# Altium PCB 175-00023, rev3, PCB, Sinistro Pwr Supply.PcbDoc (part 1 of 2)
Units mil, origin at the board's own origin, x right, y up, seen from the top; angles counter-clockwise.
Board outline 8267.72 x 3937.01 mil, 5 copper layers (TopLayer (*.GTL), MidLayer1 (*.G1), AGND (*.GP1), GND (*.GP2), BottomLayer (*GBL)); 101 components, 68 nets, 420 pads, 79 vias.
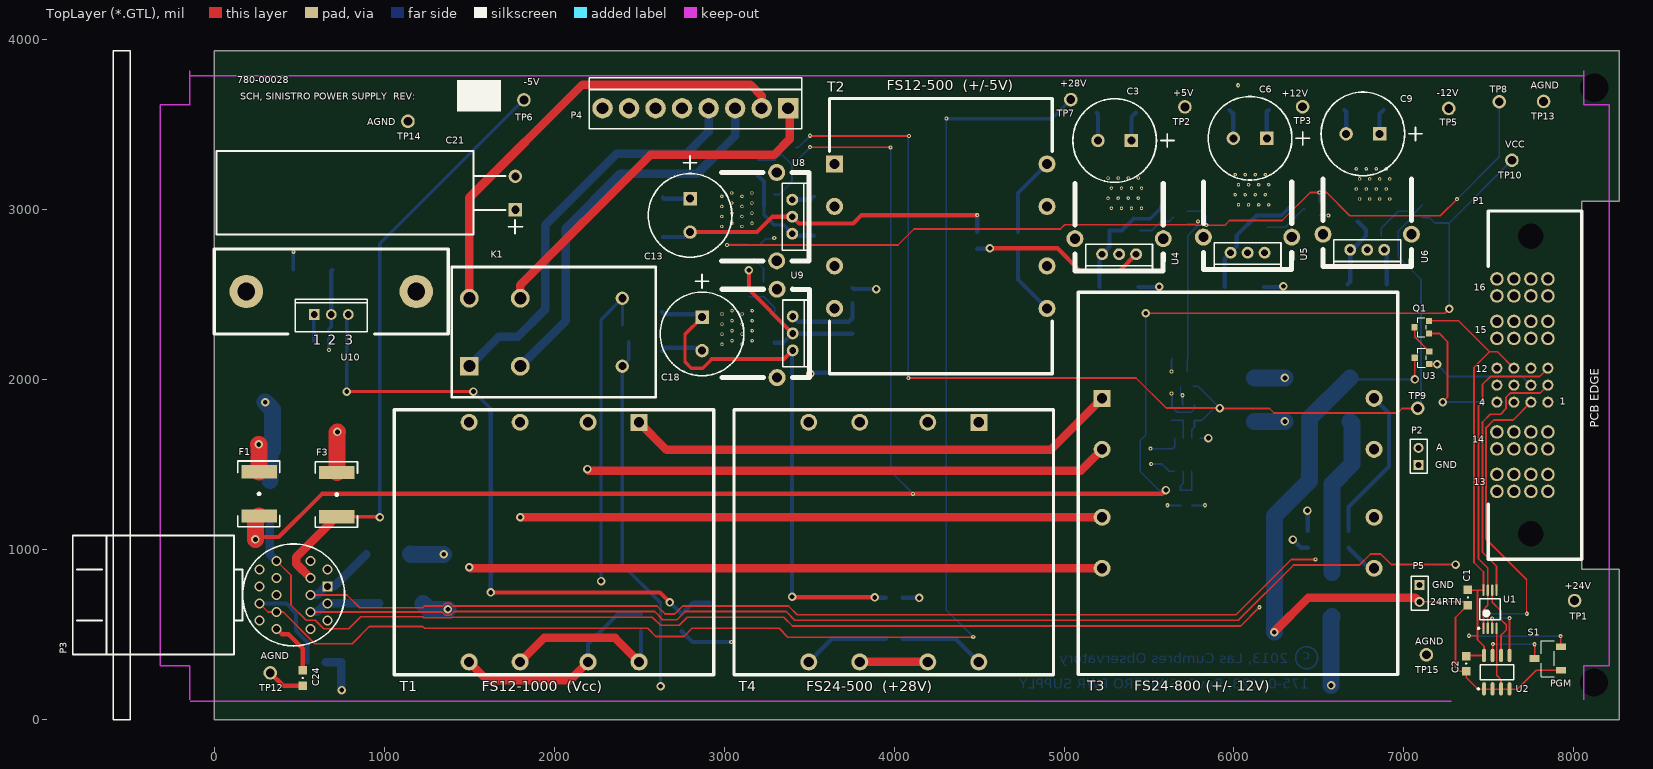
[diagram p0: TopLayer (*.GTL) view]
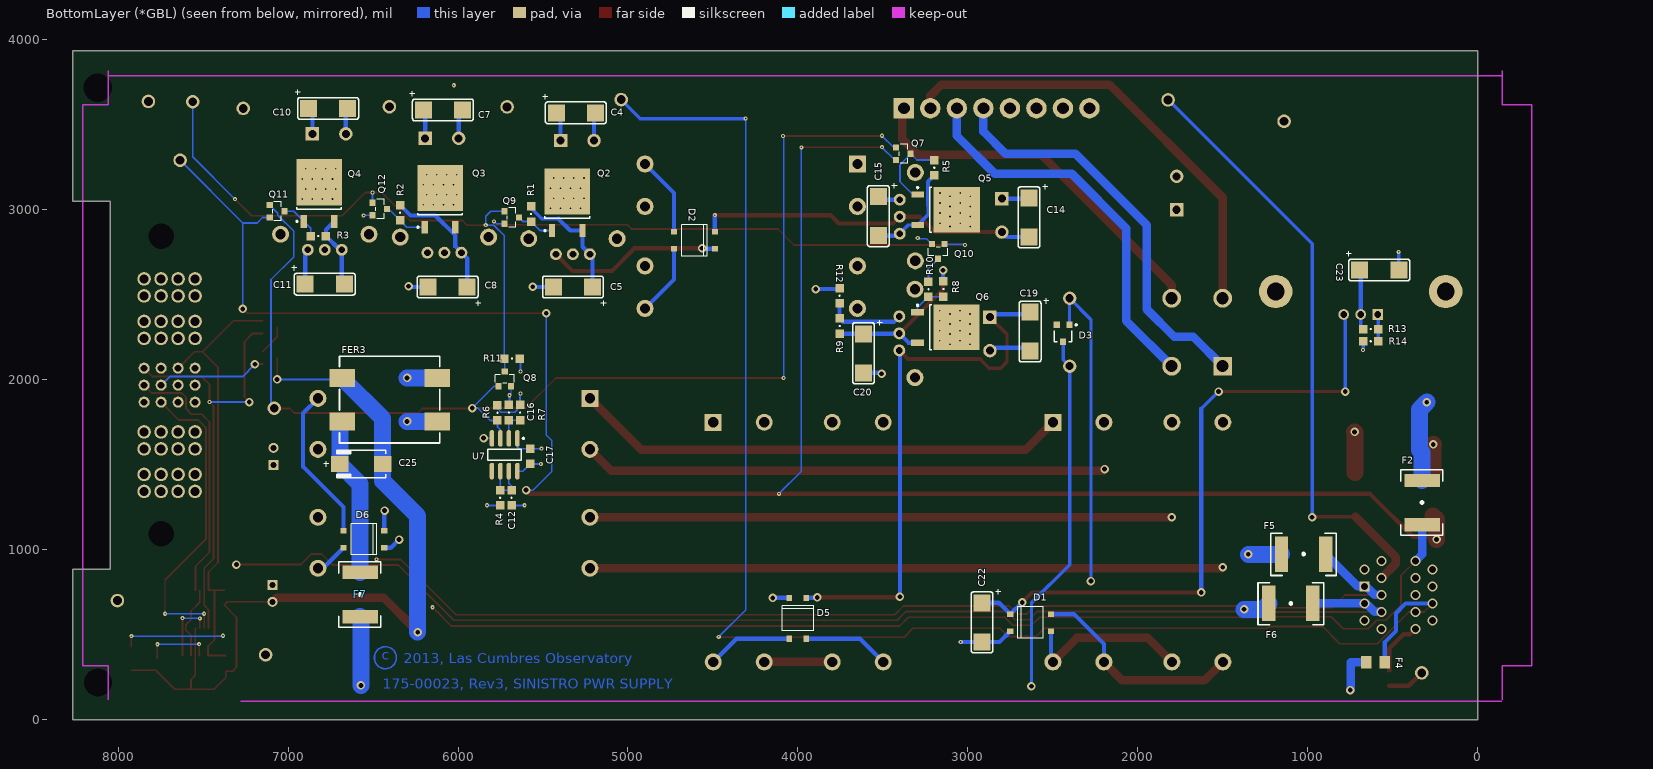
[diagram p1: BottomLayer (*GBL) view, seen from below]
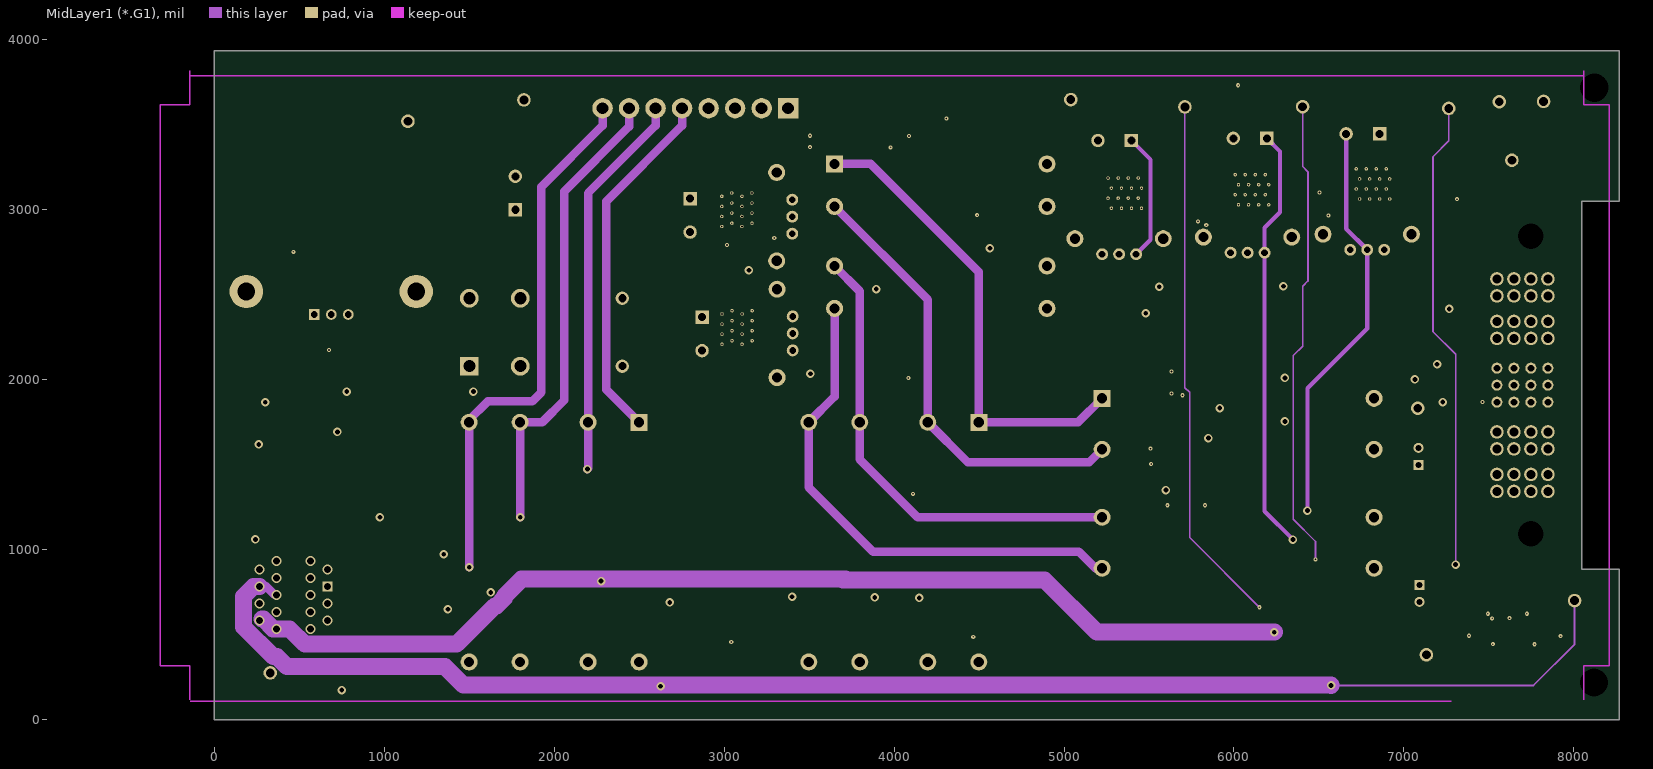
[diagram p2: MidLayer1 (*.G1)]
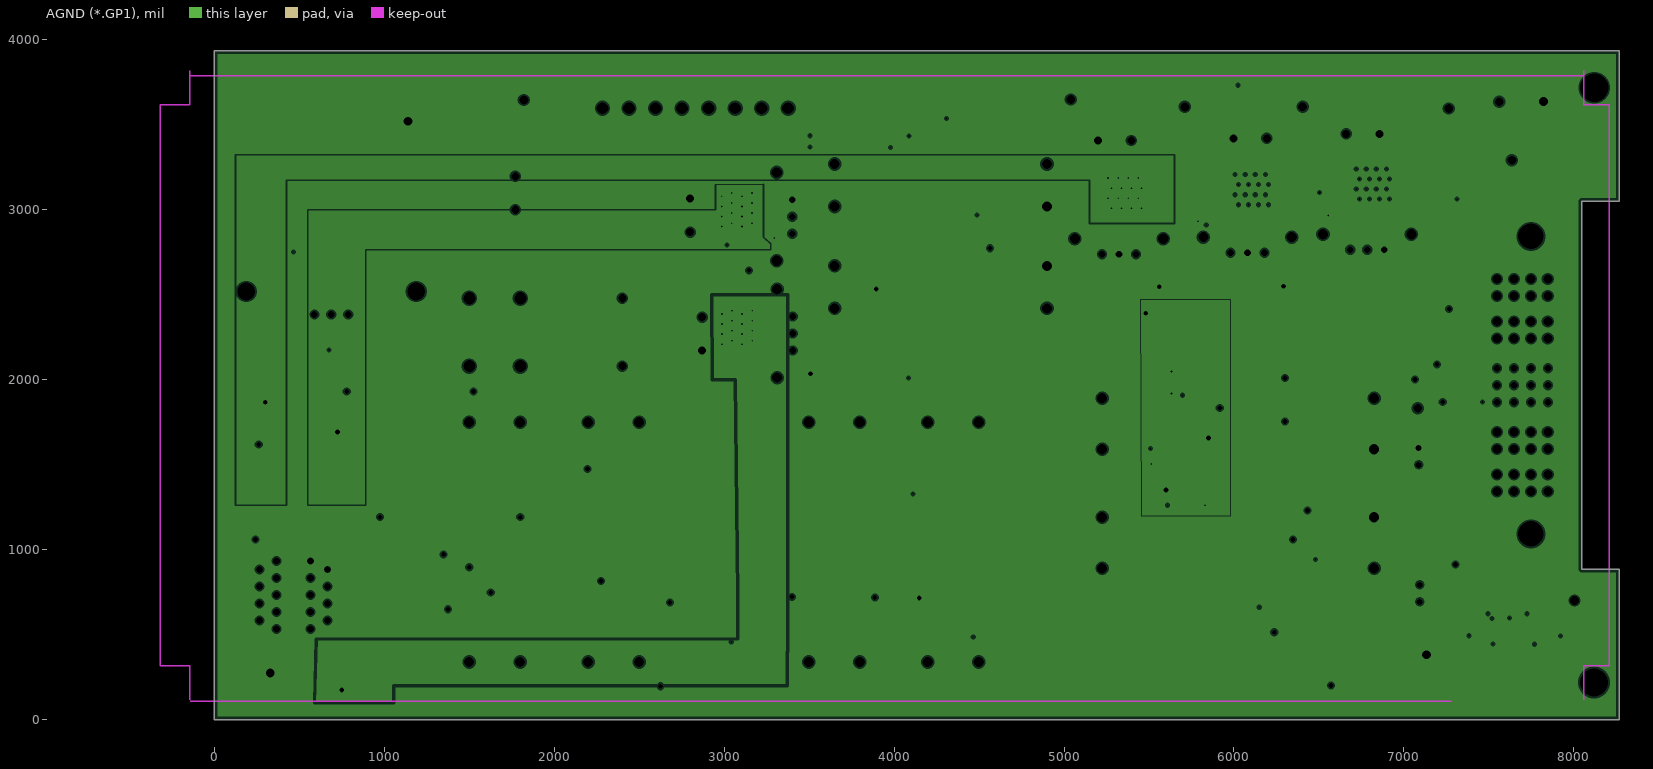
[diagram p3: AGND (*.GP1), clearances drawn from the general rule]
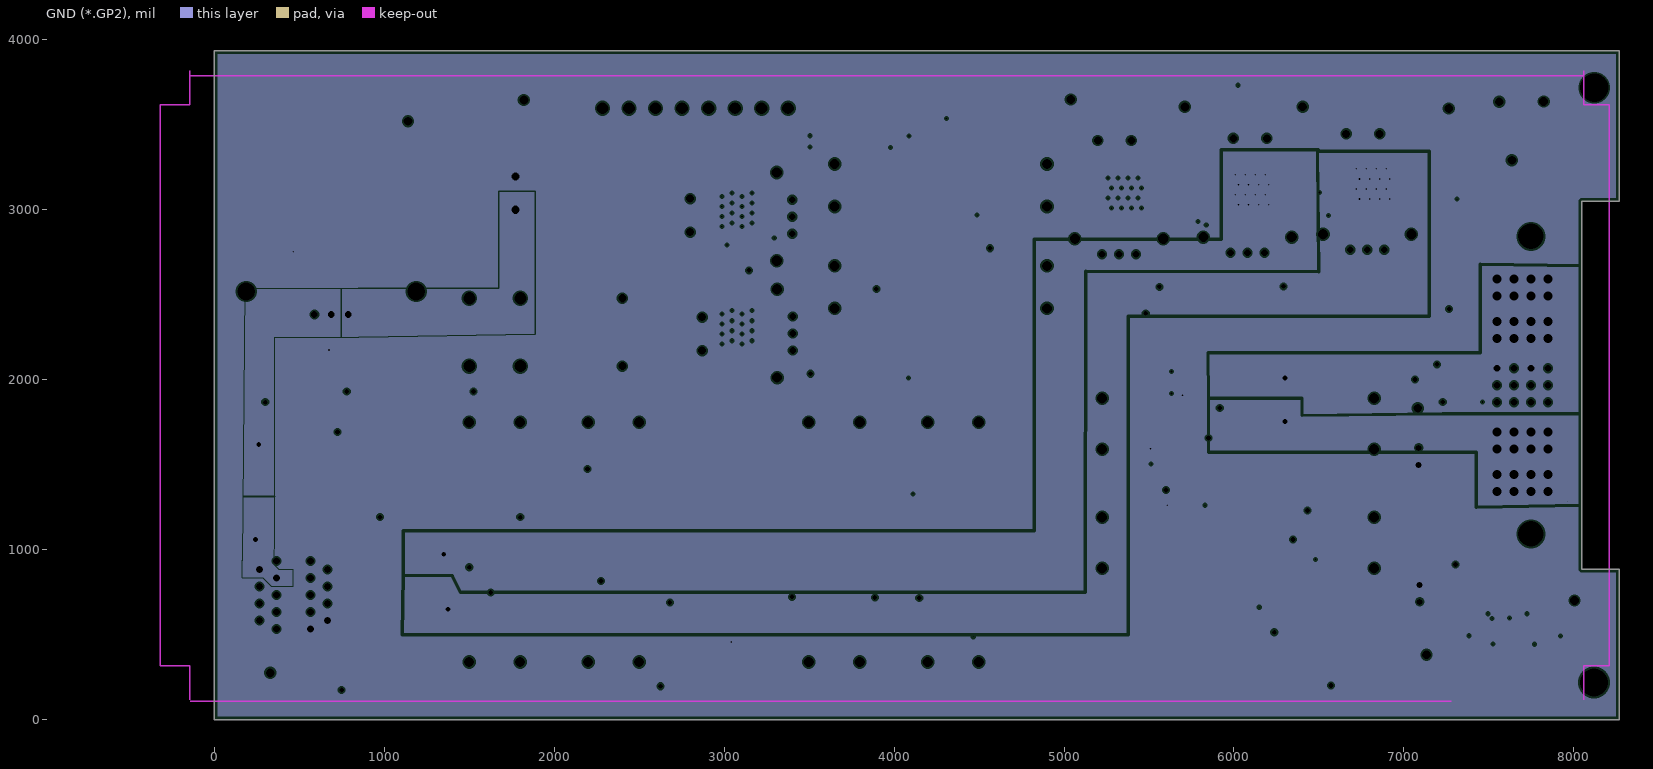
[diagram p4: GND (*.GP2), clearances drawn from the general rule]

## Layer stack, top to bottom
TopLayer (*.GTL): signal copper 1.4
Dielectric: core 12.6, FR-4, Dk 4.8
MidLayer1 (*.G1): signal copper 1.4
Dielectric: prepreg 12.6, FR-4, Dk 4.8
AGND (*.GP1): plane copper 1.4, net (Multiple Nets)
Dielectric: core 12.6, FR-4, Dk 4.8
GND (*.GP2): plane copper 1.4, net (Multiple Nets)
Dielectric: prepreg 12.6, FR-4, Dk 4.8
BottomLayer (*GBL): signal copper 1.4

## Board outline
0,0 0,3937.01 8267.72,3937.01 8267.72,3051.18 8047.24,3051.18 8047.24,885.83 8267.72,885.83 8267.72,0

## Design rules (kind name [scope] priority, off if disabled: settings)
Clearance [All] p1: gap=5
ComponentClearance "Big Bypass Caps" [(HasFootprint('CAP, Thru Hole 12.5 mm dia'))] p1: gap=-100 collisioncheckmode=3 verticalgap=-100 showdistances=FALSE
ComponentClearance [All] p2: gap=10 collisioncheckmode=3 verticalgap=10 showdistances=FALSE
FabricationTestPointUsage TestPointUsage [All] p1: valid=0 allowmultiple=FALSE
FabricationTestpoint Testpoint [All] p1: side=3 testpointundercomponent=TRUE minsize=40 maxsize=100 preferedsize=60 minholesize=20 maxholesize=40 preferedholesize=32 testpointgrid=1 allowsidetop=TRUE allowsidebottom=TRUE usegrid=TRUE gridtolerance=0.01
PlaneClearance [All] p1: clearance=10
PlaneConnect "Dpak plane" [(HasFootprint('LEMO SIZE 3 18-PIN PCB') OR HasFootprint('TO-252(D-PAK)  PowerPAD'))] p1: planeconnectstyle=Direct reliefexpansion=20 reliefentries=4 reliefconductorwidth=10 reliefairgap=10
PlaneConnect [All] p2: planeconnectstyle=Relief reliefexpansion=20 reliefentries=4 reliefconductorwidth=10 reliefairgap=10
PolygonConnect [All] p1: connectstyle=Relief reliefconductorwidth=10 reliefentries=4 polygonreliefangle="90 Angle"
RoomDefinition "780-00028_rev3_Pg1, Sinistro Power Supply" [InComponentClass('780-00028_rev3_Pg1, Sinistro Power Supply')] p1: confinementstyle=ConfineIn formatcopy=TRUE lockcomponents=FALSE outline -1336,-116 8165.84,-116 8165.84,3704.08 -1336,3704.08
RoomDefinition "780-00028_rev3_Pg2, Sinistro Power Supply" [InComponentClass('780-00028_rev3_Pg2, Sinistro Power Supply')] p2: confinementstyle=ConfineIn formatcopy=TRUE lockcomponents=FALSE outline -1900,-1600 8850,-1600 8850,6050 -1900,6050
RoutingVias [All] p1: holewidth=28 width=50 viastyle="Through Hole" minholewidth=10 minwidth=24 maxholewidth=28 maxwidth=50
SilkscreenOverComponentPads [All] p1: minsilkscreentomaskgap=10
SolderMaskExpansion [All] p1: expansion=2
Width [All] p1: maxlimit=120 minlimit=7 preferedwidth=20
22 further rules are at their usual default settings.

## Classes and differential pairs
component class "780-00028_rev3_Pg2, Sinistro Power Supply": C3 C4 C5 C6 C7 C8 C9 C10 C11 C12 C13 C14 C15 C16 C17 C18 C19 C20 D2 D3 D5 D6 F2 F3 F4 F5 F6 HS1 HS2 HS3 HS4 HS5 HS6 K1 P4 Q2 Q3 Q4 Q5 Q6 Q7 Q8 Q9 Q10 Q11 Q12 R1 R2 R3 R4 R5 R6 R7 R8 R9 R10 R11 R12 T2 T3 T4 TP2 TP3 TP5 TP6 TP7 TP8 TP9 U4 U5 U6 U7 U8 U9
component class "780-00028_rev3_Pg1, Sinistro Power Supply": C1 C2 C21 C22 C23 C24 C25 D1 F1 F7 FER3 P1 P2 P3 P5 Q1 R13 R14 S1 T1 TP1 TP10 TP12 TP13 TP14 TP15 U1 U2 U3 U10

## Components (designator, comment, footprint, x,y, rotation, side; value= is the part's Value field where it differs from the comment)
C1 "Cap SMD" SMD_0805 7376.3,720 r270 top
C2 "Cap SMD" SMD_0805 7366.3,330 r270 top
C3 "10V" "CAP, Thru Hole 12.5 mm dia" 5298,3408 r0 top
C4 "35V" SMD_CAP_6032 5307,3571 r0 bottom
C5 "35V" SMD_CAP_6032 5324,2546 r180 bottom
C6 "25V" "CAP, Thru Hole 12.5 mm dia" 6094.57,3421 r0 top
C7 "35V" SMD_CAP_6032 6089,3588 r0 bottom
C8 "35V" SMD_CAP_6032 6061,2546 r180 bottom
C9 "25V" "CAP, Thru Hole 12.5 mm dia" 6758.43,3447 r0 top
C10 "35V" SMD_CAP_6032 6764,3597 r0 bottom
C11 "35V" SMD_CAP_6032 6783.99,2563 r0 bottom
C12 "1u" SMD_0805 5685,1306 r270 bottom
C13 "10V" "CAP, Thru Hole 12.5 mm dia" 2800,2967.57 r90 top
C14 "35V" SMD_CAP_6032 2641,2956 r90 bottom
C15 "35V" SMD_CAP_6032 3527,2963 r90 bottom
C16 "1u" smd_0805 5701,1807 r270 bottom
C17 "Cap SMD" SMD_0805 5576,1550 r270 bottom
C18 "50V" "CAP, Thru Hole 12.5 mm dia" 2870.44,2270 r90 top
C19 "35V" SMD_CAP_6032 2634,2284 r90 bottom
C20 "35V" SMD_CAP_6032 3614,2156 r90 bottom
C21 "10V" "CAP, Thru Hole 12.5 mm dia" 1771.65,3099.06 r270 top
C22 "35V" SMD_CAP_6032 2917,573 r90 bottom
C23 "35V" SMD_CAP_6032 580,2646 r0 bottom
C24 "1u" SMD_0805 521,245 r90 top
C25 "35V" SMD_CAP_7343 6569.28,1505 r0 bottom
D1 "Diode Bridge" "DIODE BRIDGE, MBS-2" 2631,571 r270 bottom
D2 "Diode Bridge" "DIODE BRIDGE, MBS-2" 4609,2821 r90 bottom
D3 "Diode BAS16" SOT-23 2440,2274 r0 bottom
D5 "Diode Bridge" "DIODE BRIDGE, MBS-2" 4001,597 r0 bottom
D6 "Diode Bridge" "DIODE BRIDGE, MBS-2" 6554,1062 r90 bottom
Designator92 "Comment" "TARGET MECHANICAL 5" -725,-1553 r0 top
Designator93 "Comment" "TARGET MECHANICAL 5" -1038,4238 r0 top
Designator94 "Comment" "TARGET MECHANICAL 5" 8481,4222 r0 top
F1 "Res 0805" "SMD 2920  PolySwitch" 264,1329 r90 top
F2 "Res 0805" "SMD 2920  PolySwitch" 328,1278 r90 bottom
F3 "Res 0805" "SMD 2920  PolySwitch" 721.3,1325 r90 top
F4 "Res 0805" SMD_1206 602,338 r180 bottom
F5 "Res 0805" "SMD 2920  PolySwitch" 1025,975 r0 bottom
F6 "Res 0805" "SMD 2920  PolySwitch" 1100,684.33 r0 bottom
F7 "Res 0805" "SMD 2920  PolySwitch" 6576,737 r90 bottom
FER3 "ACM1513-551-2PL-TL" ACM1513-551-2PL 6402,1883 r0 bottom
K1 "G4W-2212P" "RELAY OMRON G4W-2212P" 1501,2080 r180 top
P1 "PETC-02-12-02--01-S-RA-SD" PETC-02-12-02-01-RA 7696.85,1968.5 r0 top locked
P2 "Header 2" HDR1X2 7086,1500 r90 top
P3 "LEMO 3S 18p RT PCB" "LEMO SIZE 3 18-PIN PCB" 466.93,734.33 r180 top
P4 "Header 8 0.156\"" "HDR 1X8 0.156\"" 3377,3598.06 r180 top
P5 "Header 2" HDR1X2 7092,794 r270 top
Q1 "FDV304P" SMD_SOT23_3 7105,2309 r90 top
Q2 "I" "TO-252(D-PAK)  PowerPAD" 5357.76,3049.26 r90 bottom
Q3 "I" "TO-252(D-PAK)  PowerPAD" 6105.63,3069.37 r90 bottom
Q4 "STD30NF03L" "TO-252(D-PAK)  PowerPAD" 6817.68,3103.37 r90 bottom
Q5 "STD30NF03L" "TO-252(D-PAK)  PowerPAD" 3124.74,3000.63 r180 bottom
Q6 "I" "TO-252(D-PAK)  PowerPAD" 3125.68,2308.43 r180 bottom
Q7 "FDV304P" SMD_SOT23_3 3380,3330 r270 bottom
Q8 "MOSFET-N SOT23" SMD_SOT23_3 5725,2005 r180 bottom
Q9 "MOSFET-N SOT23" SMD_SOT23_3 5684.11,2955 r270 bottom
Q10 "MOSFET-N SOT23" SMD_SOT23_3 3175,2755 r0 bottom
Q11 "FDV304P" SMD_SOT23_3 7065,2992 r270 bottom
Q12 "MOSFET-N SOT23" SMD_SOT23_3 6460,3005 r270 bottom
R1 "Res 0805" SMD_0805 5570,2976 r90 bottom
R2 "Res 0805" SMD_0805 6341,2983 r90 bottom
R3 "Res 0805" SMD_0805 6822,2846 r0 bottom
R4 "Res 0805" SMD_0805 5752,1306 r90 bottom
R5 "Res 0805" SMD_0805 3198,3248 r90 bottom
R6 "Res 0805" SMD_0805 5768,1806 r270 bottom
R7 "Res 0805" SMD_0805 5635,1807 r90 bottom
R8 "Res 0805" SMD_0805 3144,2534 r90 bottom
R9 "Res 0805" SMD_0805 3754,2317 r270 bottom
R10 "Res 0805" SMD_0805 3231.97,2533 r270 bottom
R11 "Res 0805" SMD_0805 5682.69,2125 r180 bottom
R12 "Res 0805" SMD_0805 3755,2495 r270 bottom
R13 "Res 0805" SMD_0805 629.98,2298.68 r0 bottom
R14 "Res 0805" SMD_0805 629.98,2226.68 r180 bottom
S1 "CJS-1200TB" CAS-120B 7846.3,360 r90 top
T1 "12 VA" "XFRMR TRIAD FS10-1200 (12VA)" 2000,1045 r270 top locked
T2 "6VA" "XFRMR TRIAD FS10-600 (6 VA)" 4275,2845 r0 top locked
T3 "20VA" "XFRMR TRIAD FS28-700 (20VA)" 6024.3,1391 r0 top locked
T4 "12 VA" "XFRMR TRIAD FS10-1200 (12VA)" 3998.43,1045 r270 top locked
TP1 "Test point" PAD_80D_052H 8004,701 r90 top
TP2 "Test point" PAD_80D_052H 5711,3606 r90 top
TP3 "Test point" PAD_80D_052H 6404,3607 r90 top
TP5 "Test point" PAD_80D_052H 7264,3597 r90 top
TP6 "Test point" PAD_80D_052H 1822,3647 r90 top
TP7 "Test point" PAD_80D_052H 5040,3649 r90 top
TP8 "Test point" PAD_80D_052H 7561,3636 r90 top
TP9 "Test point" PAD_80D_052H 7081.3,1833 r90 top
TP10 "Test point" PAD_80D_052H 7635,3292 r90 top
TP12 "Test point" PAD_80D_052H 330,276 r90 top
TP13 "Test point" PAD_80D_052H 7822,3638 r90 top
TP14 "Test point" PAD_80D_052H 1140,3521 r90 top
TP15 "Test point" PAD_80D_052H 7132,382 r90 top
U1 "SN74CBT3306PWLE" PW008_N 7506.3,650 r90 top
U2 "M24C32RMN1" SOP8_N 7546.3,280 r90 top
U3 "DS2411" SMD_SOT23_3 7106.3,2130 r90 top
U4 "Voltage Reg, Pos Fixed" "TO-220 w/Heatsink 7136DG" 5324,2640.57 r0 top
U5 "Voltage Reg, Pos Fixed" "TO-220 w/Heatsink 7136DG" 6080,2649.57 r0 top
U6 "Voltage Reg, Neg Fixed" "TO-220 w/Heatsink 7136DG" 6784,2666.57 r0 top
U7 "LM555CMX" M08A_M 5726,1559 r270 bottom
U8 "Voltage Reg, Neg Fixed" "TO-220 w/Heatsink 7136DG" 3499.43,2960 r90 top
U9 "LM350T" "TO-220 w/Heatsink 7136DG" 3501.97,2273 r90 top
U10 "LM350T" TO-220-AB 688.98,2384.25 r0 top

## Footprints (in the part's own frame and the unit in brackets; to place one, negate y for a bottom-side part, rotate by r counter-clockwise, add the part's x,y. Pads: shape width x height; smd on the part's side, far side on the other; paste and mask are expansions set on the pad)
ACM1513-551-2PL [mil] "TDK Power Line Common Mode Filter, 10A"
  rect 150x106 smd: 1(-280,128) 2(-280,-128) 3(280,-128) 4(280,128)
  silkscreen extent -295,-255 295,255
"CAP, Thru Hole 12.5 mm dia" [mm]
  rect 2x2 hole 1.2: 1(2.5,0)
  round 2 hole 1.2: 2(-2.5,0)
  silkscreen extent -6.25,-6.25 8.87,6.25
CAS-120B [mm] "Copal Electronics CAS SMD Slide Switch"
  rect 1x1.5 smd: 1(-1.75,-1.95) 2(0,1.95) 3(1.75,-1.95)
  silkscreen extent -2.69,-1 2.69,1
"DIODE BRIDGE, MBS-2" [mm] "SMD DIODE BRIDGE"
  rect 0.82x0.92 smd: 1(-1.275,-3.05) 2(1.275,-3.05) 3(1.275,3.05) 4(-1.275,3.05)
  silkscreen extent -2.35,-1.9 2.35,1.9
HDR1X2 [mm] "Connector; Header; 2 Position"
  rect 1.5x1.5 hole 0.9: 1(0,0)
  round 1.5 hole 0.9: 2(2.54,0)
  silkscreen extent -1.27,-1.27 3.81,1.27
"HDR 1X8 0.156\"" [mil] "Connector; Header; 8 Position"
  rect 120x120 hole 70: 1(0,0)
  round 120 hole 70: 2(156,0) 3(312,0) 4(468,0) 5(624,0) 6(780,0) 7(936,0) 8(1092,0)
  silkscreen extent -80,-180 1170,120
"LEMO SIZE 3 18-PIN PCB" [mm]
  rect 1.5x1.5 hole 1: 1(-5.08,-1.27)
  round 1.5 hole 1: 2(-5.08,-3.81) 3(-2.54,-5.08) 4(2.54,-5.08) 5(5.08,-3.81) 6(5.08,-1.27) 7(5.08,1.27) 8(5.08,3.81) 9(2.54,5.08) 10(-2.54,5.08) 11(-5.08,3.81) 12(-5.08,1.27) 13(-2.54,0) 14(-2.54,-2.54) 15(2.54,-2.54) 16(2.54,0) 17(2.54,2.54) 18(-2.54,2.54)
  silkscreen extent -7.62,-8.89 33.02,8.89
M08A_M [mm] "SOIC, 8-Leads, Body 4.9x3.9mm, Pitch 1.27mm, IPC Low Density"
  oval 2.5x0.7 smd: 1(-2.45,1.905) 2(-2.45,0.635) 3(-2.45,-0.635) 4(-2.45,-1.905) 5(2.45,-1.905) 6(2.45,-0.635) 7(2.45,0.635) 8(2.45,1.905)
  silkscreen extent -2.57,-2.5 0.8,2.93, body extent -2,-2.5 2,2.5, height 1.75
PAD_80D_052H [mil]
  round 80 hole 52: 1(0,0)
PETC-02-12-02-01-RA [mil] "Samtec Male Pins, PWR(4), Signal(12), Right Angle"
  round 59.06 hole 150 unplated: 0(50,-875) 0(50,875)
  round 65 hole 40: 1(150,-100) 2(50,-100) 3(-50,-100) 4(-150,-100) 5(150,0) 6(50,0) 7(-50,0) 8(-150,0) 9(150,100) 10(50,100) 11(-50,100) 12(-150,100)
  round 80 hole 52: 13(-150,-625) 13(-150,-525) 13(-50,-625) 13(-50,-525) 13(50,-625) 13(50,-525) 13(150,-625) 13(150,-525) 14(-150,-375) 14(-150,-275) 14(-50,-375) 14(-50,-275) 14(50,-375) 14(50,-275) 14(150,-375) 14(150,-275) 15(-150,275) 15(-150,375) 15(-50,275) 15(-50,375) 15(50,275) 15(50,375) 15(150,275) 15(150,375) 16(-150,525) 16(-150,625) 16(-50,525) 16(-50,625) 16(50,525) 16(50,625) 16(150,525) 16(150,625)
  silkscreen extent -200,-1025 350,1025
PW008_N [mm] "SOP, 8-Leads, Body 3x4.4mm, Pitch 0.65mm, IPC Medium Density"
  oval 1.7x0.35 smd: 1(-2.85,0.975) 2(-2.85,0.325) 3(-2.85,-0.325) 4(-2.85,-0.975) 5(2.85,-0.975) 6(2.85,-0.325) 7(2.85,0.325) 8(2.85,0.975)
  silkscreen extent -2.97,-1.55 1.6,1.82, body extent -2.25,-1.55 2.25,1.55, height 3.1
"RELAY OMRON G4W-2212P" [mm] "OMRON AC SWITCHING RELAY"
  rect 2.8x2.8 hole 1.8: 1(0,0)
  round 2.8 hole 1.8: 2(0,-10.16) 3(-7.62,0) 4(-7.62,-10.16)
  round 2 hole 1.2: 5(-22.86,0) 6(-22.86,-10.16)
  silkscreen extent -27.86,-14.83 2.64,4.67
"SMD 2920  PolySwitch" [mm] "Use with SMD polyswitch fuse"
  rect 2x5.3 smd: 1(3.3,0) 2(-3.3,0)
  silkscreen extent -4.9,-3.1 4.9,3.2
SMD_0805 [mil]
  rect 50x50 smd: 1(-45,0) 2(45,0)
  silkscreen extent -1,-1 1,1
smd_0805 [mil] "Chip Resistor; Body 2.0 x 1.3 mm (LxW typ)"
  rect 50x50 smd: 1(-45,0) 2(45,0)
  silkscreen extent -1,-1 1,1
SMD_1206 [mil]
  rect 63x75 smd: 1(-55,0) 2(55,0)
SMD_CAP_6032 [mil]
  rect 100x100 smd: NEG(-115,0) POS(115,0)
  silkscreen extent -179,-110 195,64
SMD_CAP_7343 [mil]
  rect 102x94 smd: NEG(-126,0) POS(126,0)
  silkscreen extent -145,-80 220,80
SMD_SOT23_3 [mil]
  rect 36x36 smd: 1(-37,-43) 2(37,-43) 3(0,43)
  silkscreen extent -57,-25 57,25
SOP8_N [mm] "SOIC, 8-Leads, Body 4.9x3.9mm, Pitch 1.27mm, IPC Medium Density"
  oval 2x0.6 smd: 1(-2.5,1.905) 2(-2.5,0.635) 3(-2.5,-0.635) 4(-2.5,-1.905) 5(2.5,-1.905) 6(2.5,-0.635) 7(2.5,0.635) 8(2.5,1.905)
  silkscreen extent -2.62,-2.5 1.1,2.88, body extent -2,-2.5 2,2.5, height 1.75
SOT-23 [mm] "SOT-23; 3 Leads; Body 3.0 x 2.6 mm, inc. leads (LxW max)"
  rect 0.9x0.95 smd: 1(-0.95,-1.25) 2(0.95,-1.25) 3(0,1.25)
  silkscreen extent -2.07,-1.37 1.3,1.25
"TARGET MECHANICAL 5" [mil]
"TO-220 w/Heatsink 7136DG" [mil]
  round 100 hole 60: 0(-260,190) 0(260,190)
  round 70 hole 40: 1(100,98.43) 2(0,98.43) 3(-100,98.43)
  silkscreen extent -260,0 260,515
TO-220-AB [mm] "TO, Thru-Hole, Vertical, Heatsink Mounted; 3 In-Line Leads; Pitch 2.54 mm"
  rect 1.6x1.6 hole 1: 1(-2.54,0)
  round 1.6 hole 1: 2(0,0) 3(2.54,0)
  silkscreen extent -5.35,-2.55 5.35,2.25
"TO-252(D-PAK)  PowerPAD" [mil] "D-PAK, 3-Pads, Body 6.2x6.7mm (max), IPC Medium Density"
  rect 74.8x37.4 smd: 1(-171.26,89.76) 3(-171.26,-89.76)
  round 20 hole 10: 2(-39.37,-19.69) 2(-39.37,98.43) 2(-39.37,-78.74) 2(-39.37,39.37) 2(19.68,-98.43) 2(19.68,-39.37) 2(19.68,19.68) 2(19.68,78.74) 2(78.74,-19.69) 2(78.74,98.43) 2(78.74,-78.74) 2(78.74,39.37) 2(137.8,78.74) 2(137.8,-98.43) 2(137.8,-39.37) 2(137.8,19.68)
  rect 271.65x267.72 smd: 2(59.06,0)
  silkscreen extent -176,-132 -88,135, body extent -98,-132 146,132, height 94
"XFRMR TRIAD FS10-600 (6 VA)" [mil] "TRANSFORMER, 6VA, 5V @ 1.2 A"
  rect 100x100 hole 60: 1(-625,425)
  round 100 hole 60: 2(-625,175) 3(-625,-175) 4(-625,-425) 5(625,425) 6(625,175) 7(625,-175) 8(625,-425)
  silkscreen extent -655,-810 655,810
"XFRMR TRIAD FS10-1200 (12VA)" [mil] "TRANSFORMER, 12 VA, 5V @ 2.4A"
  rect 100x100 hole 60: 1(-705,500)
  round 100 hole 60: 2(-705,200) 3(-705,-200) 4(-705,-500) 5(705,500) 6(705,200) 7(705,-200) 8(705,-500)
  silkscreen extent -780,-940 780,940
"XFRMR TRIAD FS28-700 (20VA)" [mil] "TRANSFORMER, 20VA 28VCT @ 0.7A"
  rect 100x100 hole 60: 1(-800,500)
  round 100 hole 60: 2(-800,200) 3(-800,-200) 4(-800,-500) 5(800,500) 6(800,200) 7(800,-200) 8(800,-500)
  silkscreen extent -940,-1125 940,1125

## Part data
C1 C2 C17: "Capacitor"
C3 C6 C9 C13 C18 C21: library part "Cap Elec, 330 uF, 35V", "Radial Thru hole"
C4 C5 C7 C8 C10 C11 C14 C15 C19 C20 C22 C23 C25: library part "Cap Tant 35V", "outline 6.0mm x 3.2mm"
C12 C16 C24: library part Cap, "Capacitor"
D1 D2 D5 D6: "Full Wave Diode Bridge"
D3: "Silicon Switching Diode for High-Speed Switching"
F1 F2 F3 F4 F5 F6 F7: library part "Fuse Resettable", "Polyswitch"
FER3: library part "Trans Ideal", "Transformer (Ideal)"
K1: library part "Relay 240V, 2 FORM A, DPST", "Omron G4W DPST Non-Latching"
P1: "SAMTEC, SIGNAL(12)+PWR(4)"
P2 P5: "Header, 2-Pin"
P3: library part "LEMO 18 pin PCB RT", "LEMO S3 18p RT"
P4: "Header, 6-Pin"
Q1 Q7 Q11: "P-MOSFET LOGIC LEVEL"
Q2 Q3 Q6: library part IRF5303P, "P-Chan MOSFET"
Q4 Q5: "N-Chan MOSFET"
Q8 Q9 Q10 Q12: "N Chan MOSFET LOGIC LEVEL"
R1 R2 R3 R4 R5 R6 R7 R8 R9 R10 R11 R12 R13 R14: library part "Res SMD", "Resistor 0805"
S1: library part SW_SPDT_DOUG
T1: library part "XFRMR, 120/240, 12 VA", "TRIAD FS12-1000"
T2: library part "XFRMR, 120/240, 12 VA", "TRIAD FS12-500"
T3: library part "XFRMR, 120/240, 12 VA", "TRIAD FS28-700"
T4: library part "XFRMR, 120/240, 12 VA", "TRIAD FS10-1200"
TP1 TP2 TP3 TP5 TP6 TP7 TP8 TP9 TP10 TP12 TP13 TP14 TP15: "Test Point"
U1: "Dual FET Bus Switch"
U2: "32 Kbit Serial I²C Bus EEPROM"
U3: "Silicon Serial Number"
U4 U5: "7805A"
U6 U8: "79xx"
U7: "Timer"
U9 U10: "3-Amp Adjustable Regulator"

## Free pads (board coordinates)
  round 196.85 hole 105.12 paste-6 mask-3.5: 0(188.98,2519.68) 0(1188.98,2519.68)
  round 157.48 hole 166.14 unplated: 2(8117.93,219) 2(8120.08,3719)

## Via types
v1: diameter 50, hole 28, TopLayer (*.GTL) to BottomLayer (*GBL), 41 vias
v2: diameter 24, hole 10, TopLayer (*.GTL) to BottomLayer (*GBL), 38 vias

## Nets (pads, with @x,y where several pads share a name; then routed paths per layer and width w, separated by ;. In a path a pad name is that pad's centre, name@x,y a point inside that pad or via, vN(x,y) a via of type N, cw(c..) or ccw(c..) an arc to the next point about the centre after c; other vN are vias at no path point)
24RTN: C1.2 C2.2 C24.2 C25.NEG D3.1 FER3.3 K1.6 P3.8 P3.9 P5.2 S1.1 U1.4 U2.1 U2.2 U2.3 U2.4 U3.3 | length 13472.7
  TopLayer (*.GTL) w10: v1(6237,515) v1@6237,518 ; U3.3@7063.3,2130 7063.3,2003.7 v1(7065,2002) ; P5.2@7092,694 7357.3,694 C1.2@7376.3,675 7303,601.7 7303,308 7326,285 C2.2@7366.3,285 7366.3,248.7 7436,179 U2.3@7571.3,179 ; U1.4@7544.68,537.8 7545.3,537.18 7545.3,261.7 7571.3,235.7 U2.3@7571.3,181.57 U2.3@7571.3,179 ; S1.1@7923.07,291.1 7779.1,291.1 7667,179 U2.3@7571.3,179
  TopLayer (*.GTL) w25: P3.9@366.93,534.33 398.44,502.81 437.81,502.81 521,419.63 C24.2@521,290
  TopLayer (*.GTL) w50: v1@6237,518 6438,719 7067,719 P5.2@7092,694
  MidLayer1 (*.G1) w100: P3.8@280.95,592.45 289.27,592.45 347.39,534.33 P3.9@366.93,534.33 443.67,534.33 533,445 1427,445 1651,669 1660.14,669 1707,715.86 1707,725 1809,827 3713.06,827 ; 3701,823 4886,823 5194,515 v1(6237,515)
  BottomLayer (*GBL) w10: FER3.3@6682,2011 6691,2002 v1(7065,2002)
  BottomLayer (*GBL) w20: v1(2276,816) 2276,2355 K1.6@2401,2480 2402.6,2478.4 D3.1@2402.6,2323.21
  BottomLayer (*GBL) w100: v1(6237,515) 6237,1199 6443.28,1405.28 C25.NEG@6443.28,1505 6443.28,1772.28 FER3.3@6682,2011
+3.3V_BKPL: C1.1 C2.1 P1.11 Q1.2 S1.3 U1.8 U2.8 | length 3327.5
  TopLayer (*.GTL) w10: Q1.2@7149.3,2347 7321.3,2347 7503.8,2164.5 ; C2.1@7366.3,375 7369.72,378.43 U2.8@7471.3,378.43 7471.3,433 7432.3,472 7432.3,494 ; C1.1@7376.3,765 7379.09,762.2 7432.3,762.2 ; v2(7383.3,494) 7432.3,494 ; P1.11@7646.85,2068.5 7550.85,2164.5 7503.8,2164.5 ; v2(7922.3,492) 7923.07,491.23 S1.3@7923.07,428.9 ; 7432.3,494 7432.3,762.2 ; 7432.3,762.2 U1.8@7467.91,762.2 7467.91,869.39 7412.3,925 7412.3,2073 7503.8,2164.5
  BottomLayer (*GBL) w10: v2(7383.3,494) 7385.3,492 v2(7922.3,492)
+5V: F2.2 P3.4 TP2.1 | length 9543.6
  TopLayer (*.GTL) w10: P3.4@366.93,934.33 452,849.26 452,675 541,586 594,586 644,536 791.35,536 861.35,606 1227,606 1233,600 1395.71,600 1399.21,603.5 2578,603.5 2625.5,556 2736.5,556 2784,603.5 3351.34,603.5 3402.84,552 6039.01,552 v2(6149,662)
  MidLayer1 (*.G1) w10: TP2.1@5711,3606 5711,1954 5739,1926 5739,1072 v2(6149,662)
  BottomLayer (*GBL) w50: F2.2@328,1148.08 328,973.26 P3.4@366.93,934.33
+5V_ON: Q2.1 Q9.3 R1.1 | length 225.5
  BottomLayer (*GBL) w10: Q2.1@5447.53,2878 5517,2878 R1.1@5570,2931 5617.11,2931 Q9.3@5641.11,2955
+12V: F5.2 P3.1 P3.13 TP3.1 | length 9351.4
  TopLayer (*.GTL) w10: P3.13@566.93,734.33 781.67,734.33 857,659 1227,659 1237.5,669.5 1345,669.5 1360.5,685 1389.5,685 1405,669.5 2605.33,669.5 2652.83,622 2709.17,622 2756.67,669.5 3378.68,669.5 3430.18,618 6011.67,618 6336.67,943 v2@6480,943
  MidLayer1 (*.G1) w10: TP3.1@6404,3607 6404,3254.75 6435,3223.75 6435,2581.25 6404,2550.25 6404,2198 6349,2143 6349,1180 6480,1049 v2(6480,944)
  BottomLayer (*GBL) w50: P3.13@566.93,734.33 606.3,734.33 656.3,784.33 P3.1@666.93,784.33 706.3,784.33 895.08,973.11 F5.2@895.08,975
+12V_ON: Q3.1 Q12.3 R2.1 | length 265.9
  BottomLayer (*GBL) w10: Q3.1@6195.39,2898.11 6301.11,2898.11 R2.1@6341,2938 6408,3005 Q12.3@6417,3005
+24V: D3.3 F7.2 K1.5 P3.6 P3.16 TP1.1 | length 11243.8
  MidLayer1 (*.G1) w10: v1(6571,202) 7762,202 8004,444 TP1.1@8004,701
  MidLayer1 (*.G1) w50: 306.3,784.33 P3.16@356.3,734.33
  MidLayer1 (*.G1) w100: P3.6@266.93,784.33 231.33,784.33 173,726 173,546 348,371 369.35,371 428.35,312 1358,312 1467,203 6570,203 v1(6571,202)
  BottomLayer (*GBL) w20: D3.3@2440,2224.79 2440,2119 K1.5@2401,2080 2401,913 2626,688 v1(2626,197)
  BottomLayer (*GBL) w100: v1(6571,202) 6571,602.08 F7.2@6576,607.08
+28V: F4.2 P3.7 P3.17 TP7.1 | length 8854.8
  TopLayer (*.GTL) w10: P3.7@266.93,684.33 316.93,634.33 P3.17@366.93,634.33 406.3,634.33 592.63,448 812,448 913,549 1227,549 1238.5,537.5 2550.66,537.5 2598.16,490 2763.84,490 2811.34,537.5 3324,537.5 3375.5,486 v2@4466,486
  BottomLayer (*GBL) w10: v2(4308,3537) 4308,646 v2(4466,488) v2@4466,485
  BottomLayer (*GBL) w20: v2(4308,3537) 4928,3537 TP7.1@5040,3649
  BottomLayer (*GBL) w25: P3.7@266.93,684.33 424.67,684.33 482,627 482,523 547,458 F4.2@547,338
+28V_ON: Q10.3 R10.1 | length 157.6
  BottomLayer (*GBL) w10: Q10.3@3175,2712 3231.97,2655.03 R10.1@3231.97,2578
-5V: F3.2 P3.14 TP6.1 | length 3555
  TopLayer (*.GTL) w20: F3.2@721.3,1195.08 971.92,1195.08 v1(975,1192)
  TopLayer (*.GTL) w50: P3.14@566.93,834.33 483,918.26 483,956.78 F3.2@721.3,1195.08
  BottomLayer (*GBL) w20: v1(975,1192) 975,2800 TP6.1@1822,3647
-5V_ON: Q5.1 Q7.3 R5.2 | length 479.7
  BottomLayer (*GBL) w10: R5.2@3198,3293 3300,3293 Q7.3@3337,3330 3337,3328.86 3400,3265.86 3400,3166 3324.39,3090.39 Q5.1@3296,3090.39
-12V: F6.2 P3.12 P3.18 TP5.1 | length 10203.4
  TopLayer (*.GTL) w10: P3.18@566.93,634.33 1341.17,634.33 1360.5,615 1389.5,615 1411,636.5 2591.66,636.5 2639.16,589 2722.84,589 2770.34,636.5 3365.01,636.5 3416.51,585 6025.34,585 6350.34,910 6738,910 6803,975 6863,975 6925,913 v1(7304,913)
  MidLayer1 (*.G1) w10: TP5.1@7264,3597 7264,3406 7171,3313 7171,2283 7304,2150 v1(7304,913)
  BottomLayer (*GBL) w50: P3.18@566.93,634.33 606.3,634.33 656.3,684.33 P3.12@666.93,684.33 F6.2@970.08,684.33
-12V_ON: Q4.1 Q11.3 R3.2 | length 242.2
  BottomLayer (*GBL) w10: R3.2@6867,2846 6867,2891.66 Q4.1@6907.45,2932.11 6967.34,2992 Q11.3@7022,2992
A: C3.2 C4.NEG C5.NEG C6.2 C7.NEG C8.NEG C9.1 C10.POS C11.POS C13.1 C14.POS C15.POS C18.2 C19.NEG C20.NEG C24.1 D5.2 P2.2 P3.2 P3.3 Q9.2 Q10.2 Q12.2 R12.1 T2.6 T2.7 T3.6 T3.7 TP12.1 TP13.1 TP14.1 TP15.1 U4.2 U5.2 U6.1 U8.1 | length 2275
  TopLayer (*.GTL) w25: TP12.1@330,276 406,200 C24.1@521,200
  BottomLayer (*GBL) w10: Q10.2@3212,2798 3244,2830 3290,2830 v2(3295,2835) ; Q9.2@5727.11,2918 5773.89,2918 v2(5788,2932.11) ; Q12.2@6503,2968 6554,2968 v2(6555,2967)
  BottomLayer (*GBL) w25: C19.NEG@2634,2169 2654,2189 2853.01,2189 C18.2@2870.44,2171.57 ; C14.POS@2641,3071 2646,3066 C13.1@2800,3066 ; U8.1@3401,3060 3509,3060 C15.POS@3527,3078 ; v1(3508,2036) 3513,2041 C20.NEG@3614,2041 ; R12.1@3755,2540 3761,2534 v1(3896,2534) ; D5.2@4051.2,717.08 4147.92,717.08 v1(4148,717) ; C4.NEG@5192,3571 5199.57,3563.43 C3.2@5199.57,3408 ; C5.NEG@5439,2546 5560,2546 v1(5561,2547) ; C7.NEG@5974,3588 5996.15,3565.85 C6.2@5996.15,3421 ; C8.NEG@6176,2546 6287,2546 v1(6291,2550) ; C9.1@6856.85,3447 6856.85,3564.85 C10.POS@6880,3588 ; U6.1@6884,2765 6898.99,2750.01 C11.POS@6898.99,2563
AA: P4.5 T1.1 T2.1 T3.1 T4.1 | length 7810.1
  TopLayer (*.GTL) w50: T1.1@2500,1750 2662,1588 4921.3,1588 T3.1@5224.3,1891
  MidLayer1 (*.G1) w50: T1.1@2500,1750 2307,1943 2307,3049.94 2753,3495.94 P4.5@2753,3598.06 ; T2.1@3650,3270 3863,3270 4498.43,2634.57 T4.1@4498.43,1750 5083.3,1750 T3.1@5224.3,1891
BB: P4.7 T1.3 T2.3 T3.3 T4.3 | length 8938.7
  TopLayer (*.GTL) w50: v1(1801,1192) 2358,1192 2359,1191 T3.3@5224.3,1191
  MidLayer1 (*.G1) w50: v1(1801,1192) 1800,1193 T1.3@1800,1750 1930,1750 2061,1881 2061,3109.51 2441,3489.51 P4.7@2441,3598.06 ; T2.3@3650,2670 3798.43,2521.57 T4.3@3798.43,1750 3798.43,1531.57 4139,1191 T3.3@5224.3,1191
CC: P4.6 T1.2 T2.2 T3.2 T4.2 | length 8025.7
  TopLayer (*.GTL) w50: v1(2196,1475) 2205,1466 5099.3,1466 T3.2@5224.3,1591
  MidLayer1 (*.G1) w50: v1(2196,1475) 2200,1479 T1.2@2200,1750 2200,3098.94 2597,3495.94 P4.6@2597,3598.06 ; T2.2@3650,3020 4198.43,2471.57 T4.2@4198.43,1750 4434.43,1514 5147.3,1514 T3.2@5224.3,1591
DD: P4.8 T1.4 T2.4 T3.4 T4.4 | length 9978
  TopLayer (*.GTL) w50: v1(1501,897) 1507,891 2392,891 ; 2359,891 2392,891 ; T3.4@5224.3,891 2392,891
  MidLayer1 (*.G1) w50: v1(1501,897) 1500,898 T1.4@1500,1750 1500,1764 1610,1874 1872,1874 1925,1927 1925,3135.94 2285,3495.94 P4.8@2285,3598.06 ; T2.4@3650,2420 3650,1901.57 T4.4@3498.43,1750 3498.43,1366.57 3877,988 5087.83,988 5184.83,891 T3.4@5224.3,891
GND: C12.2 C16.1 C17.1 C21.2 C22.NEG C23.NEG D1.2 P2.1 P3.10 P3.11 P5.1 Q8.2 R14.1 U7.1 | length 879.9
  BottomLayer (*GBL) w7: 5687.6,1918.4 5688,1918.8 Q8.2@5688,1962
  BottomLayer (*GBL) w10: v2(5509,1595) C17.1@5576,1595 5639,1595 5651,1607 U7.1@5651,1655.46 ; v2(5608,1262) 5609,1261 C12.2@5685,1261 ; 5687.6,1918.4 v2(5697,1909) 5697,1856 C16.1@5701,1852
  BottomLayer (*GBL) w20: C23.NEG@465,2646 465,2752 v2(466,2753) ; v2(675,2176) R14.1@675,2243
  BottomLayer (*GBL) w25: D1.2@2751.08,520.8 2813.88,458 C22.NEG@2917,458 v2(3042,458)
I2C_SCL: U1.6 U2.6 | length 430.3
  TopLayer (*.GTL) w10: U1.6@7519.09,762.2 7519.09,692.2 7571.3,640 7571.3,589 7601.3,559 7601.3,527.89 7571.3,497.89 U2.6@7571.3,378.43
I2C_SDA: U1.3 U2.5 | length 381.3
  TopLayer (*.GTL) w10: U1.3@7519.09,537.8 v2(7519.09,596.8) ; U2.5@7621.3,378.43 v2(7621.3,598)
  BottomLayer (*GBL) w10: v2(7519.09,596.8) 7520.3,598 v2(7621.3,598)
LINE: K1.2 P4.2 | length 2692.8
  TopLayer (*.GTL) w50: K1.2@1501,2480 1501,3071 2167,3737 3155,3737 3221,3671 P4.2@3221,3598.06
  BottomLayer (*GBL) w50: K1.2@1501,2480 K1.2@1505,2484
NetC3_1: C3.1 C4.POS D2.1 U4.1 | length 1956.9
  TopLayer (*.GTL) w25: v1(4564,2774) 4961,2774 5094.43,2640.57 5325.57,2640.57 U4.1@5424,2739
  MidLayer1 (*.G1) w25: C3.1@5396.43,3408 5509,3295.43 5509,2824 U4.1@5424,2739
  BottomLayer (*GBL) w25: D2.1@4488.92,2770.8 4560.8,2770.8 v1(4564,2774) ; C3.1@5396.43,3408 5396.43,3545.43 C4.POS@5422,3571
NetC5_pos: C5.POS Q2.3 R1.2 U4.3 | length 724.1
  BottomLayer (*GBL) w20: 5409,2947 5507,2947 R1.2@5570,3010
  BottomLayer (*GBL) w25: C5.POS@5209,2546 5209,2724 U4.3@5224,2739 5268,2783 Q2.3@5268,2878 5340,2878 5409,2947 ; R1.2@5570,3010 R1.2@5570,3021
NetC6_1: C6.1 C7.POS D6.1 U5.1 | length 2778.6
  MidLayer1 (*.G1) w25: C6.1@6193,3421 6271,3343 6271,2986 6180,2895 U5.1@6180,2748 6180,1227 v1(6347,1060)
  BottomLayer (*GBL) w25: C6.1@6193,3421 6193,3577 C7.POS@6204,3588 ; v1(6347,1060) 6395.2,1011.8 D6.1@6433.92,1011.8
NetC8_pos: C8.POS Q3.3 R2.2 U5.3 | length 731.1
  BottomLayer (*GBL) w25: C8.POS@5946,2546 5946,2714 U5.3@5980,2748 6015.87,2783.87 6015.87,2848.87 6134,2967 6280,2967 R2.2@6341,3028
NetC9_2: C9.2 C10.NEG D6.2 U6.2 | length 2677.9
  MidLayer1 (*.G1) w25: v1(6432,1231) 6432,1950 6784,2302 U6.2@6784,2765 6660,2889 C9.2@6660,3447
  BottomLayer (*GBL) w25: v1(6432,1231) 6433.92,1229.08 D6.2@6433.92,1112.2 ; C10.NEG@6650,3588 6660,3578 C9.2@6660,3447
NetC11_neg: C11.NEG Q4.3 R3.1 U6.3 | length 441.2
  BottomLayer (*GBL) w25: C11.NEG@6668.99,2563 6684,2578.01 U6.3@6684,2765 6696,2765 R3.1@6777,2846 6777,2883.03 Q4.3@6727.92,2932.11
NetC12_1: C12.1 R4.2 U7.6 U7.7 | length 295.7
  BottomLayer (*GBL) w10: U7.7@5701,1462.54 5701,1391 5685,1375 C12.1@5685,1351 R4.2@5752,1351 U7.6@5752,1461.54
NetC13_2: C13.2 C14.NEG D2.2 U8.2 | length 2031.9
  TopLayer (*.GTL) w25: C13.2@2800,2869.15 3194.15,2869.15 3285,2960 U8.2@3401,2960 3441,2920 3760,2920 3809,2969 v2(4488.92,2969)
  BottomLayer (*GBL) w25: C14.NEG@2641,2841 2771.85,2841 C13.2@2800,2869.15 ; D2.2@4488.92,2871.2 v2(4488.92,2969)
NetC15_neg: C15.NEG Q5.3 R5.1 U8.3 | length 589.8
  BottomLayer (*GBL) w20: 3235,3026 3235,2971.87 Q5.3@3296,2910.87 3350.13,2910.87 U8.3@3401,2860
  BottomLayer (*GBL) w25: R5.1@3198,3203 3235,3166 3235,3026 ; U8.3@3401,2860 3413,2848 C15.NEG@3527,2848
NetC16_2: C16.2 R7.1 U7.2 | length 172.5
  BottomLayer (*GBL) w10: R7.1@5635,1762 C16.2@5701,1762 U7.2@5701,1655.46
NetC18_1: C18.1 C19.POS D5.1 U9.3 | length 3250.2
  TopLayer (*.GTL) w20: C18.1@2870.44,2368.43 2770,2267.99 2770,2106 2807.5,2068.5 2874.5,2068.5 2928,2122
  TopLayer (*.GTL) w25: 2928,2122 3352.54,2122 U9.3@3403.54,2173 ; v1(3400,723) 3403,720 v1(3887,720)
  BottomLayer (*GBL) w25: C19.POS@2634,2399 2647.15,2385.85 2853.01,2385.85 C18.1@2870.44,2368.43 ; v1(3400,723) 3400,2169.46 U9.3@3403.54,2173 ; v1(3887,720) 3889.92,717.08 D5.1@3950.8,717.08
NetC20_pos: C20.POS Q6.3 R8.2 R9.2 U9.2 | length 1024.3
  TopLayer (*.GTL) w25: v1(3146,2644) 3146,2530.54 U9.2@3403.54,2273
  BottomLayer (*GBL) w25: R8.2@3144,2579 3146,2581 v1(3146,2644) ; Q6.3@3296.94,2218.66 3349.2,2218.66 U9.2@3403.54,2273 3405.54,2271 C20.POS@3614,2271 3753,2271 R9.2@3754,2272
NetC21_1: C21.1 C22.POS D1.1 U10.3 | length 3794.3
  TopLayer (*.GTL) w20: v1(780,1931) v1(1525,1931)
  TopLayer (*.GTL) w25: v1(1627,749) 2622,749 v1(2681,690)
  BottomLayer (*GBL) w20: v1(780,1931) U10.3@780,2384.25 ; v1(1525,1931) 1527,1931 1627,1831
  BottomLayer (*GBL) w25: v1(1627,749) 1627,1831 ; v1(2681,690) 2682.28,690 D1.1@2751.08,621.2 2817.88,688 C22.POS@2917,688
NetC23_pos: C23.POS F1.1 R13.2 U10.2 | length 517.5
  TopLayer (*.GTL) w100: v1(262,1620) 264,1618 F1.1@264,1458.92
  BottomLayer (*GBL) w20: R13.2@674.98,2298.68 688.98,2312.68 U10.2@688.98,2384.25
  BottomLayer (*GBL) w25: U10.2@688.98,2384.25 688.98,2639.98 C23.POS@695,2646
NetC25_pos: C25.POS F7.1 FER3.4 | length 943
  BottomLayer (*GBL) w100: F7.1@6576,866.92 6576,1385.72 C25.POS@6695.28,1505 6695.28,1741.72 FER3.4@6682,1755
NetD1_3: D1.3 T1.5 T1.7 | length 1002.1
  TopLayer (*.GTL) w50: T1.7@1800,340 1941,481 2359,481 T1.5@2500,340
  BottomLayer (*GBL) w25: T1.5@2500,340 2510.92,350.92 D1.3@2510.92,520.8
NetD1_4: D1.4 T1.6 T1.8 | length 1279.2
  TopLayer (*.GTL) w50: T1.8@1500,340 1608.26,231.74 2091.74,231.74 T1.6@2200,340
  BottomLayer (*GBL) w25: T1.6@2200,340 2200,446 2375.2,621.2 D1.4@2510.92,621.2
NetD2_3: D2.3 T2.5 | length 469.6
  BottomLayer (*GBL) w25: D2.3@4729.08,2871.2 4729.08,3099.08 T2.5@4900,3270
NetD2_4: D2.4 T2.8 | length 421.6
  BottomLayer (*GBL) w25: D2.4@4729.08,2770.8 4729.08,2590.92 T2.8@4900,2420
NetD5_3: D5.3 T4.5 | length 503.9
  BottomLayer (*GBL) w25: D5.3@4051.2,476.92 4361.5,476.92 T4.5@4498.43,340
NetD5_4: D5.4 T4.8 | length 509.1
  BottomLayer (*GBL) w25: T4.8@3498.43,340 3635.35,476.92 D5.4@3950.8,476.92
NetD6_3: D6.3 T3.5 | length 913.7
  BottomLayer (*GBL) w25: D6.3@6674.08,1112.2 6674.08,1251.08 6912,1489 6912,1803.3 T3.5@6824.3,1891
NetD6_4: D6.4 T3.8 | length 200.3
  BottomLayer (*GBL) w25: D6.4@6674.08,1011.8 6794.88,891 T3.8@6824.3,891
NetF2_1: F2.1 Q2.2 | length 483.8
  BottomLayer (*GBL) w100: v1(300,1868.5) 342,1826.5 342,1586.86 328,1572.86 F2.1@328,1407.92
NetF3_1: F3.1 Q5.2 | length 240.2
  TopLayer (*.GTL) w100: F3.1@721.3,1454.92 721.3,1689.57 v1(725.24,1693.5)
NetF4_1: F4.1 Q6.2 | length 254.8
  BottomLayer (*GBL) w50: F4.1@657,338 748,338 748,177 v1(750,175)
NetF5_1: F5.1 Q3.2 | length 195.9
  BottomLayer (*GBL) w100: F5.1@1154.92,975 1156.81,973.11 v1(1350,973.11)
NetF6_1: F6.1 Q4.2 | length 159.3
  BottomLayer (*GBL) w100: F6.1@1229.92,684.33 1264.25,650 v1(1375,650)
NetFER3_1: FER3.1 P1.13 P1.14 | length 178
  BottomLayer (*GBL) w100: FER3.1@6122,1755 v1(6300,1755)
NetFER3_2: FER3.2 P1.10 P1.12 P1.15 P1.16 | length 178
  BottomLayer (*GBL) w100: FER3.2@6122,2011 v1(6300,2011)
NetP1_2: P1.2 U1.2 | length 1835.6
  TopLayer (*.GTL) w7: v2(7723.09,623.8) 7723.09,823.2
  TopLayer (*.GTL) w10: U1.2@7493.5,537.8 v2(7493.5,623.8) ; 7723.09,823.2 7483.3,1063 7483.3,1719 7528.3,1764 7642.35,1764 P1.2@7746.85,1868.5
  BottomLayer (*GBL) w10: v2(7493.5,623.8) v2(7723.09,623.8)
NetP1_5: P1.5 U1.5 | length 1537.8
  TopLayer (*.GTL) w10: U1.5@7544.68,762.2 7544.68,903.32 7462,986 7462,1752 7508,1798 7569,1798 7600,1829 7600,1896 7626,1922 7800.35,1922 P1.5@7846.85,1968.5
NetQ1_3: Q1.3 U3.2 | length 178.6
  TopLayer (*.GTL) w10: Q1.3@7063.3,2310 7063.3,2253 U3.2@7149.3,2167
NetQ6_1: Q6.1 R8.1 R10.2 | length 205.1
  BottomLayer (*GBL) w8: R8.1@3144,2489 3230.97,2489 R10.2@3231.97,2488 3296.94,2423.02 Q6.1@3296.94,2398.19
NetR9_1: R9.1 R12.2 U9.1 | length 460.8
  BottomLayer (*GBL) w25: U9.1@3403.54,2373 3435.54,2341 3733,2341 R9.1@3754,2362 3755,2363 R12.2@3755,2450
NetR13_1: R13.1 R14.2 U10.1 | length 157.6
  BottomLayer (*GBL) w20: R14.2@585,2226.68 U10.1@585,2384.25
NetS1_2: S1.2 U2.7 | length 397.9
  TopLayer (*.GTL) w10: U2.7@7521.3,378.43 7523.3,380.43 v2(7523.3,445) ; v2(7769.3,444) 7769.53,443.77 S1.2@7769.53,360
  BottomLayer (*GBL) w10: v2(7523.3,445) 7524.3,444 v2(7769.3,444)
NetT4_6: T4.6 T4.7 | length 400
  TopLayer (*.GTL) w50: T4.7@3798.43,340 T4.6@4198.43,340
NEUT: K1.1 P4.4 | length 2407.1
  BottomLayer (*GBL) w50: K1.1@1501,2080 1673,2252 1785,2252 1948,2415 1948,2910 2368,3330 2778,3330 2909,3461 P4.4@2909,3598.06
SILICON_SN: P1.6 U3.1 | length 649.1
  TopLayer (*.GTL) w10: U3.1@7149.3,2093 7193.3,2093 v1(7195.3,2091)
  BottomLayer (*GBL) w10: v1(7195.3,2091) 7267.3,2019 7696.35,2019 P1.6@7746.85,1968.5
SPLY_DLY: Q7.1 Q8.1 Q11.1 R6.2 TP9.1 U7.3 | length 7028.1
  TopLayer (*.GTL) w10: v2(3506,3436) 3508,3434 v2(4088,3434) ; v2(4084,2011) 5424,2011 5601,1834 v1(5916,1834) 5919,1831 6209.07,1831 6235.07,1805 6963,1805 6989,1831 7079.3,1831 TP9.1@7081.3,1833
  BottomLayer (*GBL) w10: Q7.1@3423,3367 3437,3367 v2(3506,3436) ; v2(4084,2011) 4084,3430 v2(4088,3434) ; U7.3@5751,1655.46 5751,1706 5768,1723 R6.2@5768,1761 5811,1761 5884,1834 v1(5916,1834) 5788,1962 Q8.1@5762,1962 ; TP9.1@7081.3,1833 7100,1851.7 7100,2590 6967.34,2722.66 6967.34,2875.34 7060,2968 7060,2981 Q11.1@7108,3029
SW_LINE: K1.4 P4.1 | length 2202.8
  TopLayer (*.GTL) w50: K1.4@1801,2480 1801,2557 2567,3323 3293,3323 3385,3415 3385,3590.06 P4.1@3377,3598.06
SW_NEUT: K1.3 P4.3 | length 2307
  BottomLayer (*GBL) w50: K1.3@1801,2080 2068,2347 2068,2891 2389,3212 2842,3212 3065,3435 P4.3@3065,3598.06